# Altium PCB sem3200.PcbDoc
Units mm, origin at the board's own origin, x right, y up, seen from the top; angles counter-clockwise.
Board outline 86 x 33 mm, 2 copper layers (Top, Bottom); 73 components, 51 nets, 238 pads, 21 vias.
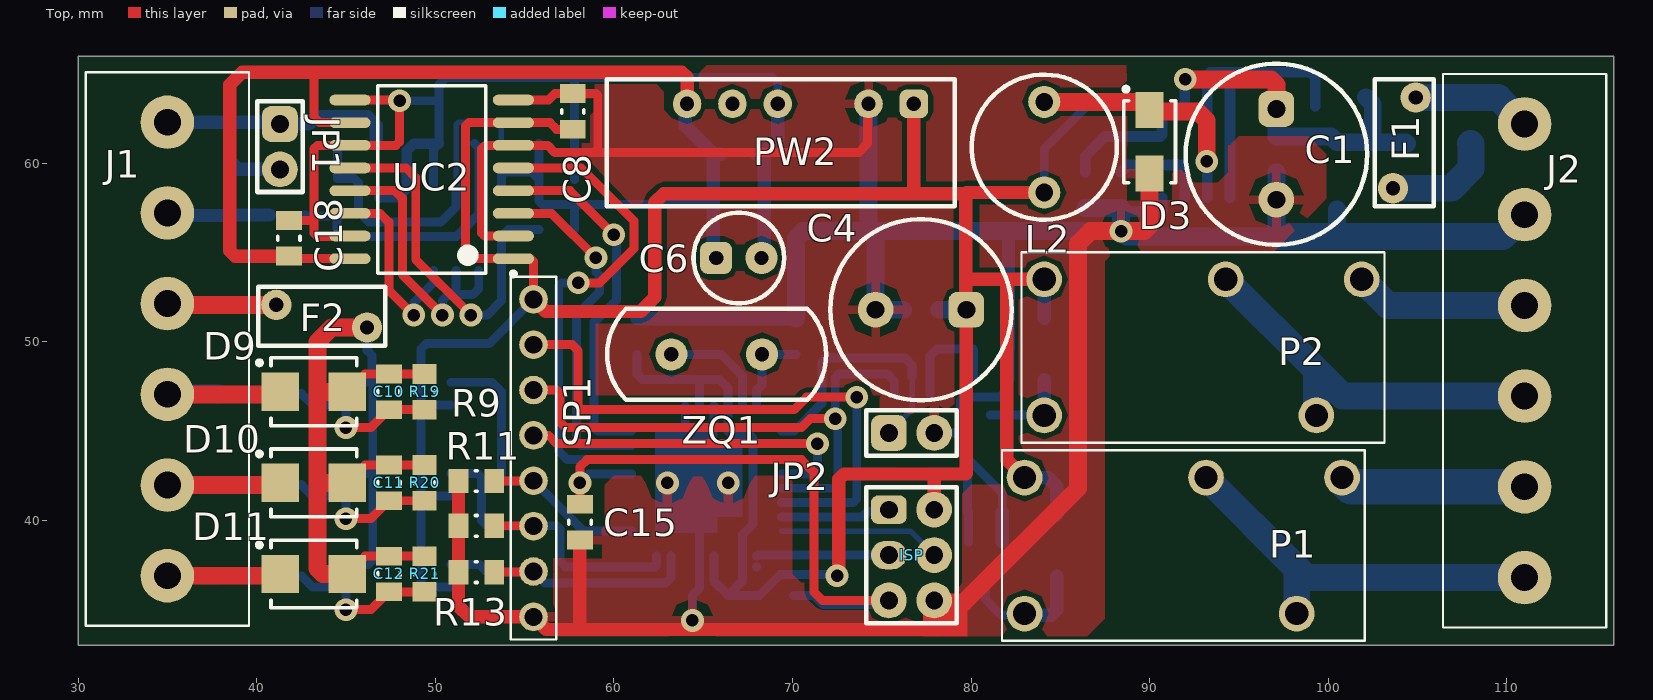
[diagram p0: Top view]
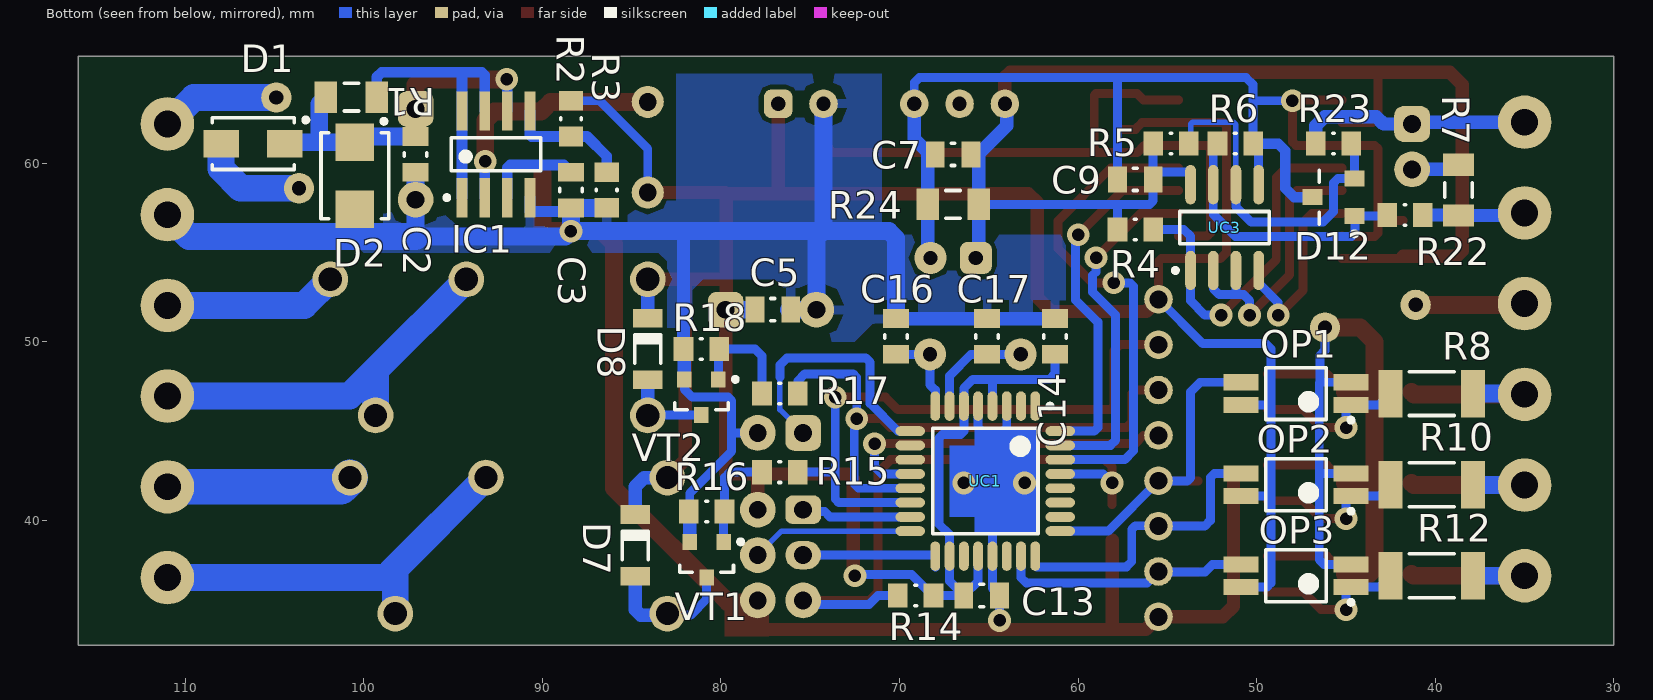
[diagram p1: Bottom view, seen from below]

## Layer stack, top to bottom
Top Solder: solder mask 0.0102, Solder Resist, Dk 3.5
Top: signal copper 0.0356
Dielectric 1: dielectric 0.32, FR-4, Dk 4.8
Bottom: signal copper 0.0356
Bottom Solder: solder mask 0.0102, Solder Resist, Dk 3.5

## Board outline
30,33 116,33 116,66 30,66

## Design rules (kind name [scope] priority, off if disabled: settings)
Clearance [All] p1: gap=0.254 ignorepadtopadclearanceinfootprint=FALSE except(0: Arc-Hole Track-Hole SMDPad-Hole THPad-Hole Via-Hole Fill-Hole Poly-Hole Region-Hole Text-Hole)
PolygonConnect [All] p1: connectstyle=Relief reliefconductorwidth=0.5 reliefentries=4 polygonreliefangle="90 Angle" airgapwidth=0.5
RoutingVias [All] p1: holewidth=0.711 width=1.27 viastyle="Through Hole" minholewidth=0.711 minwidth=1.27 maxholewidth=0.711 maxwidth=1.27
SolderMaskExpansion [All] p1: expansion=0.102
Width [All] p1: maxlimit=3 minlimit=0.254 preferedwidth=0.254
30 further rules are at their usual default settings.

## Components (designator, comment, footprint, x,y, rotation, side; value= is the part's Value field where it differs from the comment)
C1 "220.0x35V" Cap_2(10x12.5) 97.1,60.5 r270 top
C2 "0.1" CAPC2113X13N_0805 97.1,60.5 r270 bottom
C3 "470 pF" CAPC2113X13N_0805 88.4,58.5 r270 bottom
C4 "470.0x35V" Cap_2(10x12.5) 77.2,51.8 r180 top
C5 "0.1" CAPC2113X13N_0805 77.1,51.8 r180 bottom
C6 "22.0x16V" Cap_4(5x10) 67,54.7 r0 top
C7 "0.1" CAPC2113X13N_0805 67,60.5 r0 bottom
C8 "0.1" CAPC2113X13N_0805 57.7,62.9 r90 top
C9 "0.1" CAPC2113X13N_0805 56.8,59.1 r180 bottom
C10 "0.1" CAPC2113X13N_0805 47.4,47.2 r90 top
C11 "0.1" CAPC2113X13N_0805 47.4,42.1 r90 top
C12 "0.1" CAPC2113X13N_0805 47.4,37 r90 top
C13 "0.1" CAPC2113X13N_0805 65.4,35.8 r180 bottom
C14 "0.1" CAPC2113X13N_0805 61.3,50.3 r90 bottom
C15 "0.1" CAPC2113X13N_0805 58.1,39.9 r270 top
C16 "20p" CAPC2113X13N_0805 70.2,50.3 r90 bottom
C17 "20p" CAPC2113X13N_0805 65.1,50.3 r90 bottom
C18 "0.1" CAPC2113X13N_0805 41.8,55.8 r90 top
D1 "SS18" DIOD_SMA 106.2,61.1 r180 bottom
D2 "SMDJ36CA" SMB_1 100.5,59.3 r270 bottom
D3 "SS18" DIOD_SMA 90,61.2 r90 top
D7 "LL4148" DIOD_MELF_SOD80 84.8,38.6 r90 bottom
D8 "LL4148" DIOD_MELF_SOD80 84.1,49.6 r90 bottom
D9 "SMDJ36CA" SMB_1 43.2,47.2 r0 top
D10 "SMDJ36CA" SMB_1 43.2,42.1 r0 top
D11 "SMDJ36CA" SMB_1 43.2,37 r0 top
D12 "ESDA6V1L" SOT23_diod_ESDA 45.7,58.1 r0 bottom
F1 "500mA" Fuse_termo 104.9,58.6 r90 top
F2 "500mA" Fuse_termo 41.1,50.8 r0 top
IC1 "MC34063" SOIC_SO-8 92.6,60.5 r90 bottom
ISP "ISP" ISP_1 75.4,40.6 r270 top
J1 "Conn_6x1" conn6X1 35,62.3 r0 top
J2 "Conn_6x1" conn6X1 111,62.2 r0 top
JP1 "jamper" JP_2_2.5 41.3,62.2 r270 top
JP2 "jamper" JP_2_2.5 75.4,44.9 r0 top
L2 "220mH" Dr_1 84.1,60.9 r270 top
OP1 "TLP281GB" SOIC127_TPL 47.8,47.1 r0 bottom
OP2 "TLP281GB" SOIC127_TPL 47.8,42 r0 bottom
OP3 "TLP281GB" SOIC127_TPL 47.8,36.9 r0 bottom
P1 "TRJ" PCB_rele_TRJ 83,42.4 r0 top
P2 "TRJ" PCB_rele_TRJ 84.1,53.5 r0 top
PW2 "TMA_0505" TMA_1W 79.1,64.7 r180 top
R1 "1 Om" RES_1206 100.7,63.7 r0 bottom
R2 "1k2" RESC2113X0805N 88.4,62.5 r90 bottom
R3 "3k6" RESC2113X0805N 86.4,58.5 r90 bottom
R4 "10k" RESC2113X0805N 56.8,56.3 r180 bottom
R5 "4k7" RESC2113X0805N 54.8,61.1 r0 bottom
R6 "4k7" RESC2113X0805N 51.2,61.1 r180 bottom
R7 "120 Om" RES_1206 38.7,58.5 r90 bottom
R8 "2k7" Chip2Pin_2010 40.2,47.1 r0 bottom
R9 "47k" RESC2113X0805N 52.3,42.2 r180 top
R10 "2k7" Chip2Pin_2010 40.2,42 r0 bottom
R11 "47k" RESC2113X0805N 52.3,39.7 r180 top
R12 "2k7" Chip2Pin_2010 40.2,36.9 r0 bottom
R13 "47k" RESC2113X0805N 52.3,37.1 r180 top
R14 "47k" RESC2113X0805N 69.1,35.8 r180 bottom
R15 "4k7" RESC2113X0805N 76.7,42.7 r180 bottom
R16 "47k" RESC2113X0805N 80.8,40.5 r180 bottom
R17 "4k7" RESC2113X0805N 76.7,47.1 r180 bottom
R18 "47k" RESC2113X0805N 81.1,49.6 r180 bottom
R19 "1k2" RESC2113X0805N 49.4,47.2 r270 top
R20 "1k2" RESC2113X0805N 49.4,42.1 r270 top
R21 "1k2" RESC2113X0805N 49.4,37 r270 top
R22 "10 Om" RESC2113X0805N 41.7,57.1 r0 bottom
R23 "10 Om" RESC2113X0805N 45.7,61.1 r180 bottom
R24 "470 Om" RES_1206 67,57.7 r0 bottom
SP1 "SP1" Conn8x1 55.5,34.6 r0 top
UC1 "ATmega8A-AU" 32A_N 65.2,42.2 r270 bottom
UC2 "ADUM1301" SOIC127P1030X265-16N_SOIC_W 49.8,59.1 r180 top
UC3 "ADM1485" SOIC127P600X175-8N_SOIC_SO8 51.8,56.4 r90 bottom
VT1 "2N7002L" SOT_23 80.8,37.8 r270 bottom
VT2 "2N7002L" SOT_23 81.1,46.9 r270 bottom
ZQ1 "7.3728" ZQ_1 68.3,49.3 r180 top

## Footprints (in the part's own frame and the unit in brackets; to place one, negate y for a bottom-side part, rotate by r counter-clockwise, add the part's x,y. Pads: shape width x height; smd on the part's side, far side on the other; paste and mask are expansions set on the pad)
32A_N [mm] "Thin QFP, 32-Leads, Body 7x7mm, Pitch 0.8mm, IPC Medium Density"
  oval 1.65x0.55 smd: 1(-4.2,2.8) 2(-4.2,2) 3(-4.2,1.2) 4(-4.2,0.4) 5(-4.2,-0.4) 6(-4.2,-1.2) 7(-4.2,-2) 8(-4.2,-2.8) 17(4.2,-2.8) 18(4.2,-2) 19(4.2,-1.2) 20(4.2,-0.4) 21(4.2,0.4) 22(4.2,1.2) 23(4.2,2) 24(4.2,2.8)
  oval 0.55x1.65 smd: 9(-2.8,-4.2) 10(-2,-4.2) 11(-1.2,-4.2) 12(-0.4,-4.2) 13(0.4,-4.2) 14(1.2,-4.2) 15(2,-4.2) 16(2.8,-4.2) 25(2.8,4.2) 26(2,4.2) 27(1.2,4.2) 28(0.4,4.2) 29(-0.4,4.2) 30(-1.2,4.2) 31(-2,4.2) 32(-2.8,4.2)
  silkscreen extent -4.32,-2.95 2.95,3.75, body extent -3.5,-3.5 3.5,3.5, height 1.2
Cap_2(10x12.5) [mm]
  rrect50% 2x2 hole 1: 1(-2.54,0)
  round 2 hole 1: 2(2.54,0)
  silkscreen extent -5.08,-5.08 5.08,5.08, body extent -4.83,-4.83 4.83,4.83, height 12.5
Cap_4(5x10) [mm]
  rrect50% 1.8x1.8 hole 0.8: 1(-1.27,0)
  round 1.8 hole 0.8: 2(1.27,0)
  silkscreen extent -2.54,-2.54 2.54,2.54, body extent -2.3,-2.3 2.3,2.3, height 10
CAPC2113X13N_0805 [mm] "Chip Capacitor, 2-Leads, Body 2.10x1.30mm, IPC Medium Density"
  rect 1.05x1.45 smd: 1(-1,0) 2(1,0)
  silkscreen extent -0.1,-0.63 0.1,0.63, body extent -1.1,-0.7 1.1,0.7, height 1.3
Chip2Pin_2010 [mm]
  rect 1.35x2.65 smd: 1(-2.3,0) 2(2.3,0)
  silkscreen extent -1.25,-1.22 1.25,1.23, body extent -2.55,-1.3 2.55,1.3, height 0.6
conn6X1 [mm]
  round 3 hole 1.5: 1(0,0) 2(0,-5.08) 3(0,-10.16) 4(0,-15.24) 5(0,-20.32) 6(0,-25.4)
  silkscreen extent -4.57,-28.19 4.57,2.79
Conn8x1 [mm]
  round 1.6 hole 1: 1(0,0) 2(0,2.54) 3(0,5.08) 4(0,7.62) 5(0,10.16) 6(0,12.7) 7(0,15.24) 8(0,17.78)
  silkscreen extent -1.27,-1.27 1.27,19.05
DIOD_MELF_SOD80 [mm]
  rect 1.05x1.65 smd: 1(-1.725,0) 2(1.725,0)
  silkscreen extent -0.8,-0.72 0.8,0.73, body extent -1.8,-0.75 1.8,0.75, height 1.49
DIOD_SMA [mm]
  rect 2x1.55 smd: 1(-1.778,0) 2(1.778,0)
  silkscreen extent -2.3,-1.45 3.07,1.45, body extent -2.3,-1.45 2.3,1.45, height 2.44
Dr_1 [mm]
  round 1.8 hole 1: 1(-2.54,0) 2(2.54,0)
  silkscreen extent -4.06,-4.06 4.06,4.06
Fuse_termo [mm]
  round 1.7 hole 0.8: 1(0,1.27) 2(5.08,0)
  silkscreen extent -1.02,-1.02 6.1,2.29
ISP_1 [mm]
  rrect50% 1.6x2 hole 1: 1(0,0)
  round 2 hole 1: 2(0,2.54) 4(2.54,2.54) 5(5.08,0) 6(5.08,2.54)
  oval 1.6x2 hole 1: 3(2.54,0)
  silkscreen extent -1.27,-1.27 6.35,3.81
JP_2_2.5 [mm]
  rrect50% 2x2 hole 1: 1(0,0)
  round 2 hole 1: 2(2.54,0)
  silkscreen extent -1.27,-1.27 3.81,1.27
PCB_rele_TRJ [mm]
  round 2 hole 1.3: 1(0,0) 2(10.16,0) 3(17.78,0) 4(15.24,-7.62) 5(0,-7.62)
  silkscreen extent -1.27,-9.14 19.05,1.52
RES_1206 [mm] "Chip Resistor, 2-Leads, Body 3.10x1.60mm, IPC Medium Density"
  rect 1.25x1.75 smd: 1(-1.425,0) 2(1.425,0)
  silkscreen extent -0.4,-0.77 0.4,0.77, body extent -1.6,-0.85 1.6,0.85, height 0.55
RESC2113X0805N [mm] "Chip Resistor, 2-Leads, Body 2.10x1.30mm, IPC Medium Density"
  rect 1.1x1.35 smd: 1(-1,0) 2(1,0)
  silkscreen extent -0.05,-0.58 0.05,0.58, body extent -1.1,-0.7 1.1,0.7, height 0.5
SMB_1 [mm]
  rect 2.1x2.15 smd: 1(-1.875,0) 2(1.875,0)
  silkscreen extent -3.17,-1.9 2.4,1.9, body extent -2.4,-1.9 2.4,1.9, height 2.4
SOIC127_TPL [mm] "SOIC, 4-Leads, Body 2.60x4.45mm, Pitch 1.27mm, IPC Medium Density"
  rect 1.95x0.9 smd: 1(-3.075,0.635) 2(-3.075,-0.635) 3(3.075,-0.635) 4(3.075,0.635)
  silkscreen extent -3.2,-1.45 1.7,1.61, body extent -2.35,-1.45 2.35,1.45, height 2.1
SOIC127P600X175-8N_SOIC_SO8 [mm] "SOIC, 8-Leads, Body 4.90x3.90mm, Pitch 1.27mm, IPC Medium Density"
  oval 2.2x0.6 smd: 1(-2.4,1.905) 2(-2.4,0.635) 3(-2.4,-0.635) 4(-2.4,-1.905) 5(2.4,-1.905) 6(2.4,-0.635) 7(2.4,0.635) 8(2.4,1.905)
  silkscreen extent -2.52,-2.5 0.9,2.88, body extent -2,-2.5 2,2.5, height 1.75
SOIC127P1030X265-16N_SOIC_W [mm] "SOIC, 16-Leads, Body 10.30x7.50mm, Pitch 1.27mm, IPC Medium Density"
  oval 2.3x0.6 smd: 1(-4.575,4.445) 2(-4.575,3.175) 3(-4.575,1.905) 4(-4.575,0.635) 5(-4.575,-0.635) 6(-4.575,-1.905) 7(-4.575,-3.175) 8(-4.575,-4.445) 9(4.575,-4.445) 10(4.575,-3.175) 11(4.575,-1.905) 12(4.575,-0.635) 13(4.575,0.635) 14(4.575,1.905) 15(4.575,3.175) 16(4.575,4.445)
  silkscreen extent -4.7,-5.25 3.03,5.42, body extent -3.8,-5.25 3.8,5.25, height 2.65
SOIC_SO-8 [mm]
  rect 2.2x0.6 smd: 1(-2.425,1.905) 2(-2.425,0.635) 3(-2.425,-0.635) 4(-2.425,-1.905) 5(2.425,-1.905) 6(2.425,-0.635) 7(2.425,0.635) 8(2.425,1.905)
  silkscreen extent -2.55,-2.5 0.93,2.88, body extent -2,-2.5 2,2.5, height 1.75
SOT23_diod_ESDA [mm]
  rect 1.1x0.9 smd: 1(-1.175,1.05) 2(-1.175,-1.05) 3(1.175,0)
  silkscreen extent -1.3,-1.5 0.8,2.17, body extent -0.8,-1.52 0.8,1.52, height 1.4
SOT_23 [mm] "SOT23, 3-Leads, Body 2.90x2.37mm, Pitch 0.95mm, IPC Medium Density"
  rect 0.9x0.8 smd: 1(-1,0.95) 2(-1,-0.95) 3(1,0)
  silkscreen extent -1.12,-1.5 0.7,2.02, body extent -0.7,-1.5 0.7,1.5, height 1.1
TMA_1W [mm]
  rrect50% 1.6x1.6 hole 0.8: 1(2.3,1.375)
  round 1.6 hole 0.8: 2(4.84,1.375) 3(9.92,1.375) 4(12.46,1.375) 5(15,1.375)
  silkscreen extent 0,0 19.5,7.1
ZQ_1 [mm]
  round 1.8 hole 0.8: 1(0,0) 2(5.08,0)
  silkscreen extent -3.59,-2.54 8.67,2.54

## Part data
C1 C4 C6: library part Cap_pol2
C2 C3 C5 C7 C8 C9 C10 C11 C12 C13 C14 C15 C16 C17 C18: library part cap_1
D1 D3: library part Diod_30BQ100
D2 D9 D10 D11: library part Diodes_SMB
D7 D8: library part Diodes_4148
D12: library part Diod_ESDA
F1 F2: library part Fuse_term
IC1: library part MC34063_1
ISP: library part ISP_1
JP1 JP2: library part JP_2x2.5
L2: library part Dr_1
OP1 OP2 OP3: library part opto_TLP
P1 P2: library part Rele_TRJ
PW2: library part TRACO_PW1
R1 R2 R3 R4 R5 R6 R7 R8 R9 R10 R11 R12 R13 R14 R15 R16 R17 R18 R19 R20 R21 R22 R23 R24: library part rez_1
SP1: library part Conn8x1
UC1: "8-bit AVR Microcontroller, 8KB Flash, 512 Bytes EEPROM, 1KB SRAM, 32-pin TQFP, Industrial Grade (-40°C to 85°C)"
UC3: library part ADM485
VT1 VT2: library part n_chanel_tranzistor1
ZQ1: library part ZQ_1

## Via types
v1: diameter 1.27, hole 0.7, Top to Bottom, 21 vias

## Nets (pads, with @x,y where several pads share a name; then routed paths per layer and width w, separated by ;. In a path a pad name is that pad's centre, name@x,y a point inside that pad or via, vN(x,y) a via of type N, cw(c..) or ccw(c..) an arc to the next point about the centre after c; other vN are vias at no path point)
+5V: C4.1 C5.1 C8.1 C13.1 C14.1 D7.2 D8.2 ISP.2 L2.2 OP1.4 OP2.4 OP3.4 P1.1 P2.1 PW2.1 R2.2 R14.2 SP1.8 UC1.4 UC1.6 UC1.18 UC1.20 UC2.1 UC2.7 | length 177.1
  Top w0.5: SP1.8 55.5,54.5 55.345,54.655 UC2.1 52.045,54.655 51.7,55 51.7,62.1 51.875,62.275 UC2.7 56.425,62.275 56.8,61.9 C8.1
  Top w0.75: SP1.8 56.18,51.7 61.5,51.7 62.3,52.5 62.3,57.8 62.8,58.3 76.8,58.3 ; v1(72.5,36.9) 72.6,37 72.6,42.3 72.9,42.6 78,42.6 ; PW2.1 76.8,58.3 ; ISP.2 77.94,42.54 78,42.6 ; P1.1 82,43.4 82,53.5 ; P2.1 82,53.5 ; L2.2 79.76,58.36 79.7,58.3 ; 76.8,58.3 79.7,58.3 ; 78,42.6 79.7,42.6 79.74,42.64 C4.1 79.7,51.84 79.7,53.4 ; 79.7,53.4 79.7,58.3 ; 79.7,53.4 79.8,53.5 82,53.5
  Bottom w0.5: OP3.4 49.435,36.265 49.2,36.5 49.2,41.3 ; OP2.4 49.265,41.365 49.2,41.3 ; OP1.4 49.265,46.465 49.2,46.4 ; SP1.8 53.02,49.9 49.5,49.9 49.2,49.6 49.2,46.4 ; C14.1 61.3,48.2 61.6,47.9 62.634,47.9 62.638,47.896 64.8,47.896 ; UC1.4 64.8,47.896 ; UC1.20 65.6,36.6 C13.1 ; v1(72.5,36.9) 72.421,36.979 69.341,36.979 68.162,35.8 R14.2 C13.1 ; L2.2 84.1,60.8 86.8,63.5 R2.2 ; 49.2,41.3 49.2,46.4 ; 64.8,47.896 65.896,47.896 66.4,47.392 UC1.6 66.4,45 66.6,44.8 67.6,44.8 67.8,44.6 67.8,39.8 67.2,39.2 UC1.18 67.2,36.6 C13.1
  Bottom w0.75: P1.1 84.3,42.4 84.8,41.9 D7.2 ; D8.2 P2.1
  Bottom w1: C5.1@78.2,51.8 C4.1 ; L2.2@84.04,58.3 L2.2
+5V_I: C6.1 C7.1 C9.2 C18.1 PW2.5 R4.1 R5.2 R24.1 UC2.10 UC2.16 UC3.8 | length 75.5
  Top w0.5: C18.1 41.945,54.655 UC2.16 ; 43.2,65.1 43.2,62.6 43.525,62.275 UC2.10
  Top w0.75: C18.1 38.8,54.8 38.5,55.1 38.5,64.4 39.2,65.1 43.2,65.1 63.8,65.1 64.1,64.8 PW2.5
  Bottom w0.5: UC3.8 53.705,59.305 53.9,59.5 55.4,59.5 C9.2 ; R5.2 C9.2 ; R4.1 57.8,57.7 ; R24.1 57.8,57.7 ; C9.2 55.8,57.9 56,57.7 57.8,57.7
  Bottom w0.75: PW2.5 64,63.225 64,62.1 C7.1@65.575,60.525 ; C6.1 65.575,54.855 R24.1 C7.1@65.575,60.525 ; C7.1 65.6,60.5 C7.1@65.575,60.525
A: J1.1 JP1.1 R23.1 | length 13.1
  Bottom w0.75: J1.1 41.2,62.3 JP1.1 42.9,62.2 43.3,62.6 46.2,62.6 46.7,62.1 R23.1
B: J1.2 R7.1 R22.1 | length 5.8
  Bottom w0.75: J1.2 35.145,57.075 R7.1 38.725,57.1 R22.1
DI0: OP1.3 R9.1 SP1.4 UC1.25 | length 18.6
  Top w0.5: R9.1 55.48,42.2 SP1.4
  Bottom w0.5: OP1.3 53.165,47.735 53.7,47.2 53.7,42.4 53.9,42.2 55.48,42.2 SP1.4 58.32,39.4 UC1.25
DI1: OP2.3 R11.1 SP1.3 UC1.24 | length 18.9
  Top w0.5: R11.1 55.48,39.7 SP1.3
  Bottom w0.5: OP2.3 52.365,42.635 52.6,42.4 52.6,40 52.92,39.68 SP1.3 55.52,39.7 56.8,39.7 57,39.5 57,37.7 57.3,37.4 62.3,37.4 62.4,37.5 UC1.24
DI2: OP3.3 R13.1 SP1.2 UC1.23 | length 16.3
  Top w0.5: R13.1 55.46,37.1 SP1.2
  Bottom w0.5: OP3.3 52.465,37.535 52.9,37.1 55.46,37.1 SP1.2 56.14,36.5 62.9,36.5 63.2,36.8 UC1.23
DIN_0: D9.1 J1.4 R8.1 | length 9.4
  Top w1: J1.4 41.185,47.06 D9.1
  Bottom w1: J1.4 35.04,47.1 R8.1 R8.1@37.86,47.06
DIN_1: D10.1 J1.5 R10.1 | length 9.3
  Top w1: J1.5 41.205,41.98 D10.1
  Bottom w1: J1.5 37.88,41.98 R10.1
DIN_2: D11.1 J1.6 R12.1 | length 9.3
  Top w1: J1.6 41.225,36.9 D11.1
  Bottom w1: J1.6 R12.1
DO0: R15.2 SP1.7 UC1.14 | length 33.7
  Top w0.5: SP1.7@55.54,49.8 SP1.7 57.66,49.84 58,49.5 58,46.4 58.2,46.2 70.1,46.2 70.8,46.9 v1(73.6,46.9)
  Bottom w0.5: UC1.14 73.4,41 73.6,41.2 v1(73.6,46.9) ; 73.8,42.7 R15.2
DO1: R17.2 SP1.6 UC1.13 | length 32.6
  Top w0.5: SP1.6@55.6,47.2 SP1.6 56.8,47.3 57,47.1 57,45.5 57.3,45.2 70.5,45.2 71,45.7 v1(72.4,45.7)
  Bottom w0.5: UC1.13 72.3,41.8 72.539,42.039 72.539,45.561 v1(72.4,45.7) 72.4,48 72.6,48.2 75.3,48.2 75.7,47.8 R17.2
E_GND: C10.2 C11.2 C12.2 D9.2 D10.2 D11.2 F2.2 OP1.2 OP2.2 OP3.2 R19.1 R20.1 R21.1 | length 53.8
  Top w0.5: D11.2 46.075,38 C12.2 R21.1 ; D10.2 46.075,43.1 C11.2 R20.1 ; D9.2 46.075,48.2 C10.2 R19.1
  Top w1: D11.2 43.7,37 43.4,37.3 43.4,42.1 ; D10.2 43.4,42.1 ; D9.2 43.5,47.2 43.4,47.1 ; F2.2 44.2,50.8 43.4,50 43.4,47.1 ; 43.4,42.1 43.4,47.1
  Bottom w0.5: OP3.2 46.235,37.535 46.5,37.8 46.5,42.65 ; OP2.2 46.485,42.635 46.5,42.65 ; OP1.2 46.465,47.735 ; F2.2 46.18,49.52 46.465,49.235 46.465,47.735 ; 46.465,47.735 46.5,47.7 46.5,42.65
GND: C1.2 C2.2 C3.2 C4.2 C5.2 C8.2 C13.2 C14.2 C15.2 C16.2 C17.2 D2.2 D3.1 IC1.4 ISP.6 J2.2 JP2.2 PW2.2 R3.1 R9.2 R11.2 R13.2 R16.1 R18.1 SP1.1 UC1.3 UC1.5 UC1.21 UC2.2 UC2.6 UC2.8 VT1.2 VT2.2 | length 232
  Top w0.5: UC2.2 52.775,55.925 52.6,56.1 52.6,60.8 52.805,61.005 UC2.6 56.295,61.005 56.7,60.6 58.9,60.6 ; UC2.8 56.345,63.545 56.7,63.9 C8.2 59,63.9 59.1,63.8 59.1,60.8 58.9,60.6 ; PW2.2 74.2,63.265 74.2,61.1 73.7,60.6 58.9,60.6
  Top w0.75: R9.2 R11.2 R13.2 51.3,35.2 51.9,34.6 SP1.1 56.209,33.891 58.1,33.891 ; C15.2 58.1,33.891 ; ISP.6 77.94,34.24 77.591,33.891 58.1,33.891
  Top w1: ISP.6 78.06,35.4 79.6,35.4 86,41.8 86,55.5 86.7,56.2 v1(88.4,56.2) 89.7,56.2 90,56.5 D3.1
  Bottom w0.5: v1(63,42.1) 64.8,42.1 ; UC1.3 64,45.2 64.8,44.4 ; v1@64.4,34 C13.2 64.8,36.2 UC1.21 64.8,42.1 ; UC1.5 65.6,45.2 64.8,44.4 ; v1(66.4,42.1) 64.8,42.1 ; JP2.2 79.4,44.9 ; R16.1@81.75,40.45 81.75,41.523 79.4,43.873 79.4,44.9 ; VT2.2 82.05,47.35 81.6,46.9 79.6,46.9 79.4,46.7 79.4,44.9 ; 64.8,42.1 64.8,44.4
  Bottom w0.6: C3.2 88.6,57.3 90.7,57.3 90.695,57.305 IC1.4
  Bottom w0.75: C14.2 C17.2 C16.2 ; VT1.2 R16.1@81.75,40.45 ; VT2.2 82.05,49.55 R18.1 82.1,56.2
  Bottom w1: C16.2 70.2,55.8 70.6,56.2 74.26,56.2 ; PW2.2 74.26,56.2 ; C5.2@76.2,51.8 C5.2 C4.2 74.66,55.8 74.26,56.2 ; R3.1 C3.2 v1(88.4,56.2) ; C2.2 C1.2 97.1,55.9 88.7,55.9 v1(88.4,56.2) ; 100.5,55.9 D2.2 ; 74.26,56.2 82.1,56.2 v1(88.4,56.2)
  Bottom w1.5: 97.1,55.9 100.5,55.9 109.78,55.9 J2.2
  other v1: 64.4,34.4
GND_I: C6.2 C7.2 C9.1 C18.2 D12.3 PW2.3 R6.2 R24.2 UC2.9 UC2.11 UC2.15 UC3.5 | length 67.6
  Top w0.5: C18.2 43.2,56.8 ; UC2.15 45.2,55.9 43.4,55.9 43.2,56.1 43.2,56.8 ; UC2.9 47.955,63.545 v1(48,63.5) 48,61.2 47.8,61 45.23,61 UC2.11 43.405,61.005 43.2,60.8 43.2,56.8
  Bottom w0.5: v1(48,63.5) 50.2,63.5 ; UC3.5 49.895,60.795 R6.2 50.2,63.5 ; C9.1 57.8,64.8 ; PW2.3 69.18,64.52 68.9,64.8 57.8,64.8 ; 50.2,63.5 50.2,64.4 50.6,64.8 57.8,64.8
  Bottom w0.6: D12.3 47.9,58.1 48.4,58.6 48.4,60.7 48.8,61.1 R6.2
  Bottom w0.75: C7.2 68.3,60.5 C7.2@68.425,60.625 ; C6.2 68.425,54.855 R24.2 C7.2@68.425,60.625 ; PW2.3 69.18,61.38 C7.2@68.425,60.625
MOSI: ISP.4 UC1.16 | length 9.1
  Bottom w0.3: UC1.16 69.404,39.396 76.604,39.396 ISP.4
MOSO: ISP.1 UC1.15 | length 6.2
  Bottom w0.5: UC1.15 73.9,40.2 74.2,40.5 75.3,40.5 ISP.1
NetC1_1: C1.1 C2.1 D1.2 D2.1 IC1.6 R1.2 | length 20.1
  Top w1: v1(92,64.7) 96.8,64.7 97.1,64.4 C1.1
  Bottom w0.6: IC1.6 91.965,64.665 v1(92,64.7)
  Bottom w1: C1.1 C2.1 100.175,61.5 D2.1 102.5,61.175 ; R1.2 102.5,63.325 102.5,61.175 ; D1.2 104.347,61.175 102.5,61.175
NetC3_1: C3.1 IC1.3 | length 5.5
  Bottom w0.6: C3.1 88.8,59.9 91.8,59.9 91.965,59.735 IC1.3
NetC10_1: C10.1 OP1.1 R8.2 R19.2 | length 8.7
  Top w0.5: v1(45,45.2) 46.4,45.2 C10.1 R19.2
  Bottom w0.5: R8.2 43.135,46.465 OP1.1 45,46.19 v1(45,45.2)
NetC11_1: C11.1 OP2.1 R10.2 R20.2 | length 8.7
  Top w0.5: v1(45,40.1) 46.4,40.1 C11.1 R20.2
  Bottom w0.5: R10.2 43.135,41.365 OP2.1 45,41.09 v1(45,40.1)
NetC12_1: C12.1 OP3.1 R12.2 R21.2 | length 8.7
  Top w0.5: v1(45,35) 46.4,35 C12.1 R21.2
  Bottom w0.5: R12.2 43.135,36.265 OP3.1 45,35.99 v1(45,35)
NetC16_1: C16.1 UC1.8 ZQ1.1 | length 4.9
  Bottom w0.5: UC1.8 68,47.3 68.3,47.6 ZQ1.1 C16.1
NetC17_1: C17.1 UC1.7 ZQ1.2 | length 6.2
  Bottom w0.5: ZQ1.2 C17.1 66,49.3 67.2,48.1 UC1.7
NetD1_1: D1.1 F1.1 | length 6.2
  Bottom w1.5: F1.1 106.9,58.6 108,59.7 108,61.078 D1.1
NetD3_2: D3.2 IC1.2 L2.1 | length 13.9
  Top w1: L2.1 89.538,63.44 D3.2 90.078,62.9 92.7,62.9 93.2,62.4 v1(93.2,60.1)
  Bottom w0.6: v1(93.2,60.1) 93.235,60.065 IC1.2
NetD7_1: D7.1 P1.5 VT1.3 | length 7.6
  Bottom w0.5: VT1.3 80.8,35.6 81.7,34.7 82.92,34.7 P1.5
  Bottom w0.75: P1.5 83.08,34.7 84.5,34.7 84.8,35 D7.1
NetD8_1: D8.1 P2.5 VT2.3 | length 5
  Bottom w0.5: VT2.3 84.08,45.9 P2.5
  Bottom w0.75: P2.5 D8.1
NetD12_1: D12.1 R6.1 R22.2 UC3.7 | length 15.4
  Bottom w0.5: R22.2 42.75,57.05 D12.1 44.5,57.025 44.5,56.1 44.7,55.9 51.2,55.9 52.435,57.135 UC3.7 52.435,60.865 R6.1
NetD12_2: D12.2 R5.1 R23.2 UC3.6 | length 19.3
  Bottom w0.3: UC3.6 51.165,62.165 51.3,62.3 53.6,62.3 53.7,62.2 R5.1@53.7,61.1
  Bottom w0.5: R23.2 44.525,60.925 D12.2 45.45,59.15 45.7,58.9 45.7,57.3 46.3,56.7 50.3,56.7 51.165,57.565 UC3.6
NetF2_1: F2.1 J1.3 | length 6.1
  Top w1: J1.3 35.07,52.07 F2.1
NetIC1_1: IC1.1 IC1.7 IC1.8 R1.1 | length 16.9
  Bottom w0.6: IC1.7 93.235,64.935 93.4,65.1 94.505,65.1 ; IC1.1 IC1.8 94.505,65.1 ; R1.1@99.275,63.2 R1.1 99.275,64.825 99,65.1 94.505,65.1
NetIC1_5: IC1.5 R2.1 R3.2 | length 7
  Bottom w0.6: R3.2 86.4,60.4 87.5,61.5 R2.1 90.6,61.5 90.695,61.595 IC1.5
NetISP_3: ISP.3 UC1.17 | length 7.5
  Bottom w0.5: UC1.17 68.06,38.06 ISP.3 ISP.3@75.34,38
NetJ2_3: J2.3 P2.3 | length 9.7
  Bottom w1.5: P2.3 103.34,52.04 J2.3
NetJ2_4: J2.4 P2.2 P2.4 | length 22
  Bottom w1.5: P2.2 99.34,48.42 ; P2.4 99.34,48.42 ; J2.4 100.8,46.96 99.34,48.42
NetJ2_5: J2.5 P1.3 | length 10.4
  Bottom w2: P1.3 101.3,41.88 J2.5
NetJ2_6: J2.6 P1.2 P1.4 | length 22.7
  Bottom w1.5: P1.2 98.24,37.32 ; P1.4 98.24,37.32 ; J2.6 98.76,36.8 98.24,37.32
NetJP1_2: JP1.2 R7.2 | length 2.7
  Bottom w0.75: R7.2 38.965,59.66 JP1.2
NetJP2_1: JP2.1 UC1.9 | length 14.8
  Bottom w0.3: JP2.1 76.7,46.2 76.7,48.038
  Bottom w0.5: UC1.9 70.089,45 71.645,46.555 71.645,48.845 71.9,49.1 76.3,49.1 76.7,48.7 76.7,48.038
NetR4_2: R4.2 UC2.12 UC3.1 | length 20.8
  Top w0.5: UC2.12 48.365,59.735 48.908,59.192 48.908,54.603 52,51.511 v1(52,51.5)
  Bottom w0.5: v1(52,51.5) 52.9,51.5 53.705,52.305 UC3.1 53.705,55.905 54.1,56.3 R4.2
NetR15_1: R15.1 R16.2 VT1.1 | length 5.8
  Bottom w0.5: R15.1 79.5,42.7 79.8,42.4 R16.2 79.85,40.45 VT1.1
NetR17_1: R17.1 R18.2 VT2.1 | length 6.4
  Bottom w0.5: R17.1 77.7,49.2 78.1,49.6 R18.2 80.15,49.55 VT2.1
NetSP1_5: SP1.5 UC1.12 | length 19.6
  Top w0.5: SP1.5 56.34,44.76 56.8,44.3 v1(71.4,44.3)
  Bottom w0.5: UC1.12 71,42.6 71.4,43 v1(71.4,44.3)
NetUC2_13: UC2.13 UC3.2 UC3.3 | length 16.1
  Top w0.5: UC2.13 47.735,58.465 48.154,58.046 48.154,53.757 50.4,51.511 v1(50.4,51.5)
  Bottom w0.5: v1(50.4,51.5) 50.4,52.3 50.739,52.639 51.2,52.639 ; UC3.3 51.165,52.674 51.2,52.639 ; UC3.2 52.435,52.974 52.1,52.639 51.2,52.639
NetUC2_14: UC2.14 UC3.4 | length 11.1
  Top w0.5: UC2.14 46.905,57.195 47.4,56.7 47.4,52.9 v1(48.8,51.5)
  Bottom w0.5: v1(48.8,51.5) 48.8,52.2 49.895,53.295 UC3.4
RST: C15.1 ISP.5 R14.1 UC1.29 | length 36
  Top w0.5: C15.1 v1(58.1,42.1) 58.1,43 58.5,43.4 70.5,43.4 71.2,42.7 71.2,36 71.68,35.52 ISP.5 ISP.5@75.28,35.4
  Bottom w0.5: v1(58.1,42.1) 58.6,42.6 UC1.29 ; R14.1 71.2,35.8 71.7,35.3 75.18,35.3 ISP.5 ISP.5@75.12,35.8
RX: UC1.30 UC2.5 | length 28.2
  Top w0.5: UC2.5 58.165,59.735 61.139,56.761 61.139,55.228 59.211,53.3 v1(58,53.3)
  Bottom w0.5: v1(58,53.3) 57.1,53.3 56.9,53.1 56.9,43.9 57.4,43.4 UC1.30
TX: UC1.31 UC2.3 | length 19.7
  Top w0.5: UC2.3 56.505,57.195 v1(59,54.7)
  Bottom w0.5: v1(59,54.7) 59,53.911 59.2,53.711 59.2,52.8 57.9,51.5 57.9,44.5 58.2,44.2 UC1.31
TXE: UC1.32 UC2.4 | length 20.2
  Top w0.5: UC2.4 57.535,58.465 v1(60,56)
  Bottom w0.5: v1(60,56) 60.139,55.861 60.139,52.339 58.9,51.1 58.9,45.2 59.1,45 UC1.32
UPP: F1.2 J2.1 | length 6.7
  Bottom w1.5: F1.2 109.52,63.68 J2.1
pads on no net: PW2.4 UC1.1 UC1.2 UC1.10 UC1.11 UC1.19 UC1.22 UC1.26 UC1.27 UC1.28

## Polygon pours and split planes (outlines as drawn)
GND on Bottom "Bottom-No Net" (solid, remove dead copper, pour order 8): 90.5,55 100,55 101.6,56.6 101.6,58.3 96.6,58.3 94.7,56.4 90.5,56.4
GND on Bottom "Bottom-No Net" (solid, remove dead copper, pour order 6): 60.7,51 70.7,51 70.7,56 60.7,56
GND on Bottom "Bottom-No Net" (solid, remove dead copper, pour order 4): 71,65 71,56.5 69.9,55.4 69.9,51 71.5,51 72.5,50 72.6,50 76.5,50 76.5,53 77,53.5 81,53.5 81.5,53 81.6,52.9 81.6,46.8 83,46.8 83,54.5 83.5,55 91,55 91,57.9 82.5,57.9 82.5,65
GND on Top "Bottom-No Net" (solid, remove dead copper, pour order 18): 80.5,57.5 80.5,40.9 87.5,40.9 87.5,54.5 88,55 96.9,55 99.9,58 100,58 99.9,58.1 99.9,60.5 98.9,61.5 95,61.5 94.5,61 94.4,61 94.4,59.5 93.9,59 93.8,58.9 92.5,58.9 91.6,59.8 91.5,59.8 80.5,59.8
GND on Top "Bottom-No Net" (solid, remove dead copper, pour order 16): 88.704,65.5 65.203,65.5 64.819,65.1 64.819,65 64.723,64.9 64.723,63 64.243,62.5 63.284,62.5 62.804,63 62.804,64 62.325,64.5 58.2,64.5 58.2,60.6 60.79,57.9 60.79,57.7 88.8,57.7
GND on Top "Bottom-No Net" (solid, remove dead copper, pour order 14): 79.2,43.7 79.2,57.5 79,57.7 59,57.7 59,47 75,47 74.9,46.9 74.9,43.7
GND on Top "Bottom-No Net" (solid, remove dead copper, pour order 10): 56.6,33.5 86.5,33.5 87.5,34.5 87.5,42 80,42 79.5,41.5 79.5,41.4 79.5,36.5 70.5,36.5 70,37 70,42.2 69.7,42.5 60,42.5 59.5,42 59.5,39.7 59.1,39.3 56.6,39.3

## Other copper
Top:
  rectangle net GND: 77.3,33.5 79.8,35.8
Bottom:
  rectangle net GND: 65.7,40.2 67.2,44.2
  rectangle net GND: 65.6,40 65.7,44.2
  rectangle net GND: 62.3,39.3 65.8,45.1

## Silkscreen, mask and mechanical layers (free items; w line width, h text height)
Board:
  the board outline again, w0.127